# EAGLE board Płytka+PCB (EAGLE 9.7.0)
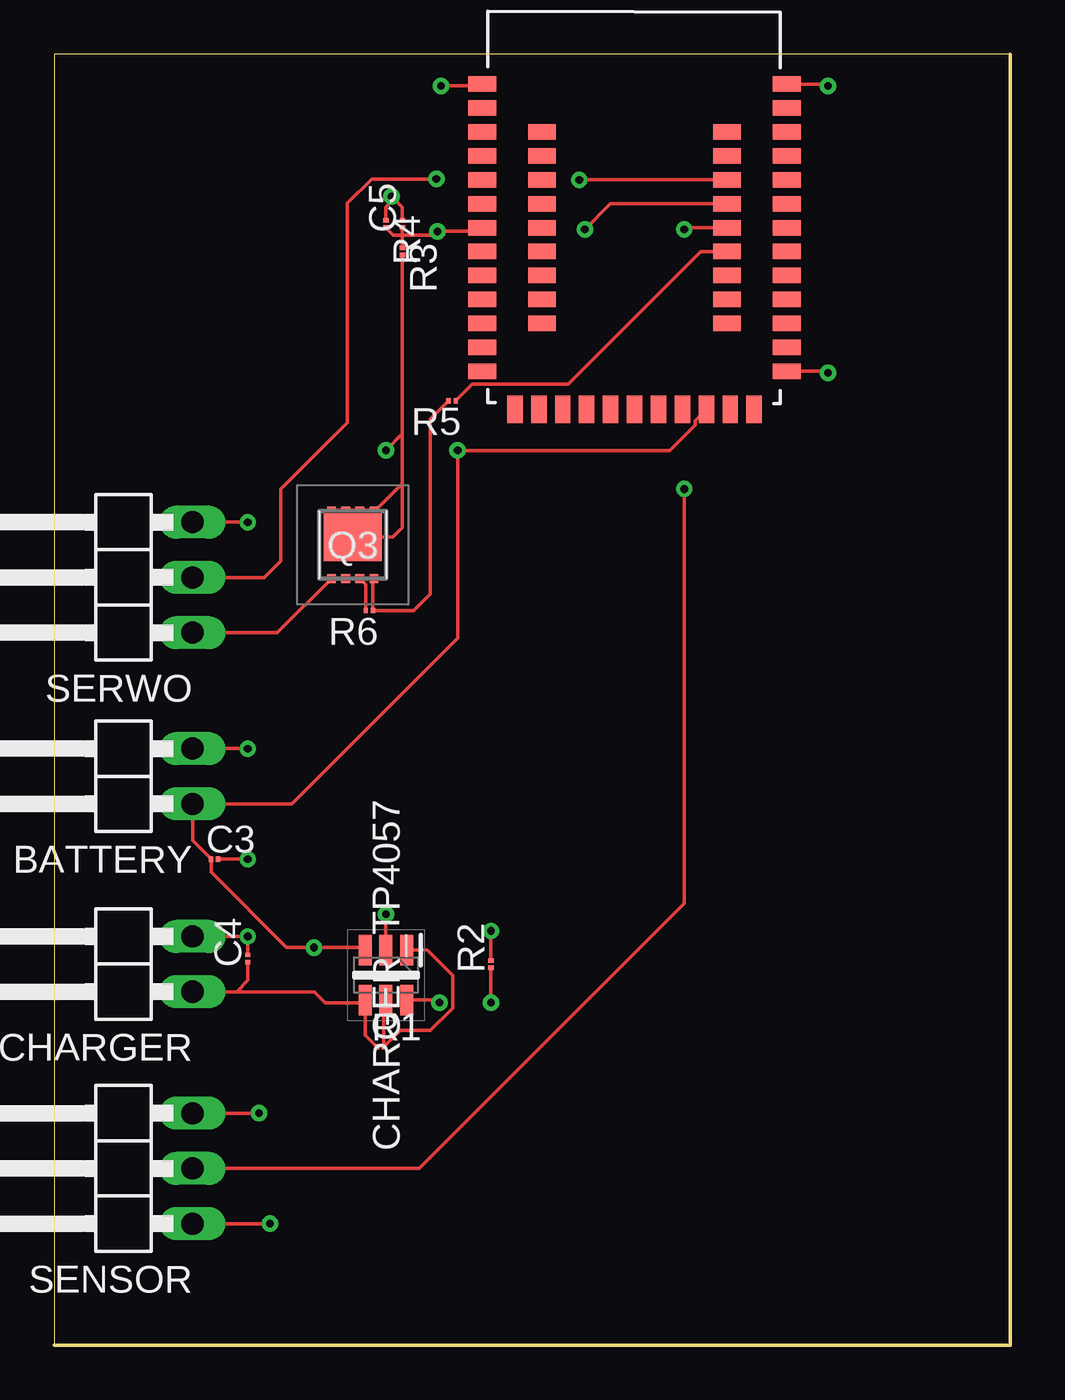
[diagram p0: board, top side]
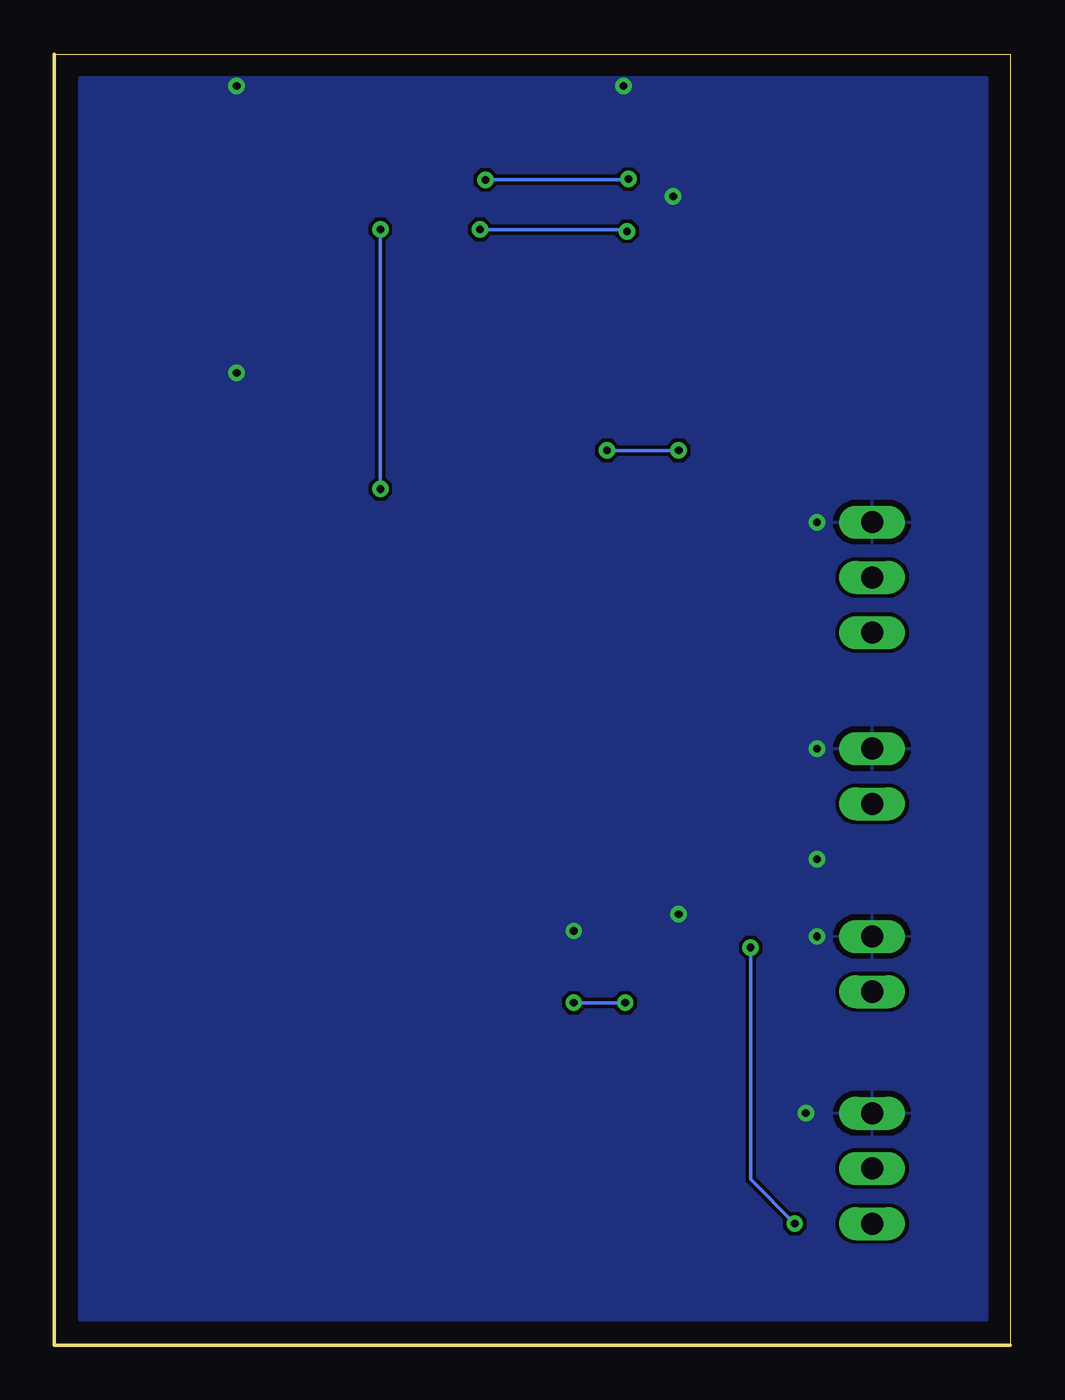
[diagram p1: board, bottom side, seen from below]

Size 43.94 x 59.36 mm. Coordinates in mm from the lower left corner, seen from the top.
Outline: 43.94,59.36 0,59.36 0,0 43.94,0 43.94,59.36
Copper layers (1*16): Top / Bottom
Stack-up Default Layer Stack: Top User Defined 0.035mm / Dielectric-1 User Defined 1.5mm / Bottom User Defined 0.035mm
Design rules: minimum copper width 6mil, minimum drill size 0.35mm, copper clearance wire_polygon to wire_polygon 6mil, copper clearance wire_polygon to pad_smd 6mil, copper clearance wire_polygon to via 6mil, copper clearance pad_smd to pad_smd 6mil, copper clearance pad_smd to via 6mil, copper clearance via to via 6mil, copper clearance smd to pad (same net) 6mil, copper clearance smd to via (same net) 6mil, copper clearance smd to smd (same net) 6mil, dimension clearance 40mil, restrict clearance 0mil, drill distance 6mil, keepout clearance 0mil

## Footprints (pad centres in the part's own frame; a part is rotated, then mirrored left to right if it is on the bottom)
1X02/90 = drill 1.016 long: 1 -1.27,-3.81; 2 1.27,-3.81
C01005 = smd 0.2 x 0.25: 1 -0.163,0; 2 0.163,0
SOT95P280X125-6N = smd 1.4 x 0.6: 1 -1.15,0.95; 2 -1.15,0; 3 -1.15,-0.95; 4 1.15,-0.95; 5 1.15,0; 6 1.15,0.95
TPN2R304PLL1Q = smd 0.4 x 0.4: 1 -0.975,-1.575; 2 -0.325,-1.575; 3 0.325,-1.575; 4 0.975,-1.575 | smd 0.4 x 0.3: 5 0.975,1.575; 6 0.325,1.575; 7 -0.325,1.575; 8 -0.975,1.575 | smd 2.65 x 2.2: 9 0,0.325
R01005 = smd 0.2 x 0.25: 1 -0.163,0; 2 0.163,0
1X03/90 = drill 1.016 long: 1 -2.54,-3.81; 2 0,-3.81; 3 2.54,-3.81
SEEED_NRF52840 = smd 1.27 x 0.711: 1 -7,5.7; 2 -7,4.6; 3 -7,3.5; 4 -7,2.4; 5 -7,1.3; 6 -7,0.2; 7 -7,-0.9; 8 -7,-2; 9 -7,-3.1; 10 -7,-4.2; 11 -7,-5.3; 12 -7,-6.4; 13 -7,-7.5; 25 7,-7.5; 26 7,-6.4; 27 7,-5.3; 28 7,-4.2; 29 7,-3.1; 30 7,-2; 31 7,-0.9; 32 7,0.2; 33 7,1.3; 34 7,2.4; 35 7,3.5; 36 7,4.6; 37 7,5.7; 38 -4.25,3.5; 39 -4.25,2.4; 40 -4.25,1.3; 41 -4.25,0.2; 42 -4.25,-0.9; 43 -4.25,-2; 44 -4.25,-3.1; 45 -4.25,-4.2; 46 -4.25,-5.3; 47 4.25,3.5; 48 4.25,2.4; 49 4.25,1.3; 50 4.25,0.2; 51 4.25,-0.9; 52 4.25,-2; 53 4.25,-3.1; 54 4.25,-4.2; 55 4.25,-5.3 | smd 0.711 x 1.27: 14 -5.5,-9.25; 15 -4.4,-9.25; 16 -3.3,-9.25; 17 -2.2,-9.25; 18 -1.1,-9.25; 19 0,-9.25; 20 1.1,-9.25; 21 2.2,-9.25; 22 3.3,-9.25; 23 4.4,-9.25; 24 5.5,-9.25

## Placement (x,y rotation side)
BATTERY  PINHD-1X2/90  [1X02/90]  2.54,26.16 90 top
C3  10u  [C01005]  7.37,22.35 0 top
C4  1u  [C01005]  8.89,17.78 90 top
C5  10n  [C01005]  16,51.56 90 top
CHARGER  PINHD-1X2/90  [1X02/90]  2.54,17.53 90 top
CHARGER_TP4057  TP4057-42-SOT26-R  [SOT95P280X125-6N]  15.24,17.02 270 top
Q3  TPN19008QM,LQ  [TPN2R304PLL1Q]  13.72,36.83 0 top
R1  1k  [R01005]  14.99,13.72 0 top
R2  1.66k  [R01005]  20.07,17.53 90 top
R3  5M  [R01005]  16,50.29 270 top
R4  10M  [R01005]  15.24,51.56 270 top
R5  100  [R01005]  18.29,43.43 180 top
R6  10k  [R01005]  14.48,33.78 180 top
SENSOR  PINHD-1X3/90  [1X03/90]  2.54,8.13 90 top
SERWO  PINHD-1X3/90  [1X03/90]  2.54,35.31 90 top
U$1  SEEED_NRF52840  [SEEED_NRF52840]  26.67,52.29 0 top

## Library data of the parts
BATTERY CHARGER = Connector; CATEGORY: Headers; DESCRIPTION: Header, Right Angle, 2 Position; MANUFACTURER: Generic; MPN: Generic; OPERATING_TEMPERATURE: Generic; PART_STATUS: Active; PITCH: 0.100" (2.54mm); ROHS_COMPLIANCE: Generic; SERIES: Generic; SUB-CATEGORY: Headers, Male Pins; TYPE: Board to Board or Cable, Unshrouded, Through Hole, Right Angle
C3-C5 = rcl; SPICEPREFIX: C
CHARGER_TP4057 = SamacSys_Parts; DESCRIPTION: PMIC - Battery Management SOT-23-6 RoHS; HEIGHT: 1.25mm; MANUFACTURER_NAME: Nanjing Extension Microelectronics; MANUFACTURER_PART_NUMBER: TP4057-42-SOT26-R
Q3 = SamacSys_Parts; DESCRIPTION: MOSFET PD=57W F=1MHZ; HEIGHT: 1mm; MANUFACTURER_NAME: Toshiba; MANUFACTURER_PART_NUMBER: TPN19008QM,LQ
R1-R6 = rcl; SPICEPREFIX: R
SENSOR SERWO = Connector; CATEGORY: Headers; DESCRIPTION: Header, Right Angle, 3 Position; MANUFACTURER: Generic; MPN: Generic; OPERATING_TEMPERATURE: Generic; PART_STATUS: Active; PITCH: 0.100" (2.54mm); ROHS_COMPLIANCE: Generic; SERIES: Generic; SUB-CATEGORY: Headers, Male Pins; TYPE: Board to Board or Cable, Unshrouded, Through Hole, Right Angle
U$1 = seeed 113990556

## Nets
5V: C4.1 CHARGER.1 CHARGER_TP4057.4 R1.1
BAT+: BATTERY.1 C3.1 CHARGER_TP4057.3 Q3.5 Q3.6 Q3.7 Q3.8 Q3.9 R3.2 SENSOR.1 U$1.22
BAT-: BATTERY.2 C3.2 C4.2 C5.2 CHARGER.2 CHARGER_TP4057.2 R2.2 R4.1 SENSOR.3 SERWO.3 U$1.1 U$1.25 U$1.37
N$2: Q3.4 R5.2 R6.1
N$5: C5.1 R3.1 R4.2 U$1.7 U$1.50
N$7: CHARGER_TP4057.6 R2.1
N$9: CHARGER_TP4057.1 CHARGER_TP4057.5 R1.2
PWM: SERWO.2 U$1.49
SENSOR: SENSOR.2 U$1.51
SERWO: Q3.1 Q3.2 Q3.3 R6.2 SERWO.1
SERWO_ON/OFF: R5.1 U$1.52

## Tracks (layer width: path | path; a pad name or v marks a point on that pad's centre or on a via)
5V
  Top 0.152: CHARGER.1 8.38,16.26 | 8.38,16.26 11.94,16.26 12.45,15.75 14.17,15.75 CHARGER_TP4057.4 14.29,14.25 R1.1 | C4.1 8.89,16.76 8.38,16.26
BAT+  (via drill 0.35)
  Top 0.152: CHARGER_TP4057.3 14.17,18.29 v11.94,18.29 10.67,18.29 7.2,21.75 C3.1 6.35,23.2 BATTERY.1 10.92,24.89 18.54,32.51 v18.54,41.15 28.29,41.15 29.45,42.31 29.45,42.52 U$1.22 | R3.2 16,41.91 | 16,41.91 16,39.62 | SENSOR.1 v9.91,5.59 | 16,41.91 v15.24,41.15 | 16,39.62 14.78,38.41 Q3.5 Q3.6 Q3.7 Q3.8 | 16,39.62 16,37.59 15.56,37.16 Q3.9
  Bottom 0.152: v11.94,18.29 11.94,7.62 v9.91,5.59 | v18.54,41.15 v15.24,41.15
BAT-  (via drill 0.35)
  Top 0.152: SERWO.3 v8.89,37.85 | 15.24,18.8 CHARGER_TP4057.2 v15.24,19.81 | U$1.1 19.59,57.91 v17.78,57.91 | U$1.25 35.48,44.79 v35.56,44.7 | U$1.37 35.48,57.99 v35.56,57.91 | BATTERY.2 v8.89,27.43 | C4.2 v8.89,18.8 CHARGER.2 | v8.89,22.35 C3.2 | R2.2 v20.07,19.05 | SENSOR.3 v9.4,10.67 | R4.1 15.24,52.32 15.49,52.58 v15.49,52.83 16,52.32 C5.2
  pour Bottom: -12.95,66.04 55.37,66.04 55.88,-3.3 52.07,-7.11 -10.92,-7.11 -13.97,-4.06
N$2
  Top 0.152: 14.73,35.21 Q3.4 14.64,35.21 R6.1 16.51,33.78 17.27,34.54 17.27,42.58 R5.2
N$5  (via drill 0.35)
  Top 0.152: R3.1 16,51.05 | C5.1 16,51.05 | R4.2 15.59,51.05 16,51.05 | U$1.50 25.56,52.49 v24.38,51.31 | 16,51.05 17.45,51.05 v17.61,51.22 19.5,51.22 U$1.7
  Bottom 0.152: v24.38,51.31 17.7,51.31 v17.61,51.22
N$7  (via drill 0.35)
  Top 0.152: CHARGER_TP4057.6 17.41,15.87 17.53,15.75 v17.7,15.75 | R2.1 v20.07,15.75
  Bottom 0.152: v17.7,15.75 v20.07,15.75
N$9
  Top 0.152: CHARGER_TP4057.5 15.15,15.78 R1.2 15.91,14.48 17.29,14.48 18.3,15.5 18.3,17 17.14,18.17 CHARGER_TP4057.1
PWM  (via drill 0.35)
  Top 0.152: SERWO.2 9.65,35.31 10.41,36.07 10.41,39.37 13.47,42.43 13.47,52.51 14.59,53.62 v17.56,53.62 | U$1.49 v24.14,53.59 v24.13,53.59
  Bottom 0.152: v24.13,53.59 17.59,53.59 v17.56,53.62
SENSOR  (via drill 0.35)
  Top 0.152: SENSOR.2 16.76,8.13 28.96,20.32 v28.96,39.37 | v28.96,51.31 29.04,51.39 U$1.51
  Bottom 0.152: v28.96,39.37 v28.96,51.31
SERWO
  Top 0.152: SERWO.1 10.25,32.77 Q3.1 Q3.2 Q3.3 14.32,34.98 R6.2
SERWO_ON/OFF
  Top 0.152: R5.1 19.21,44.2 23.62,44.2 29.72,50.29 U$1.52